# EAGLE board KE3IJ-SuperRegen-FM-receiver (EAGLE 5.07)
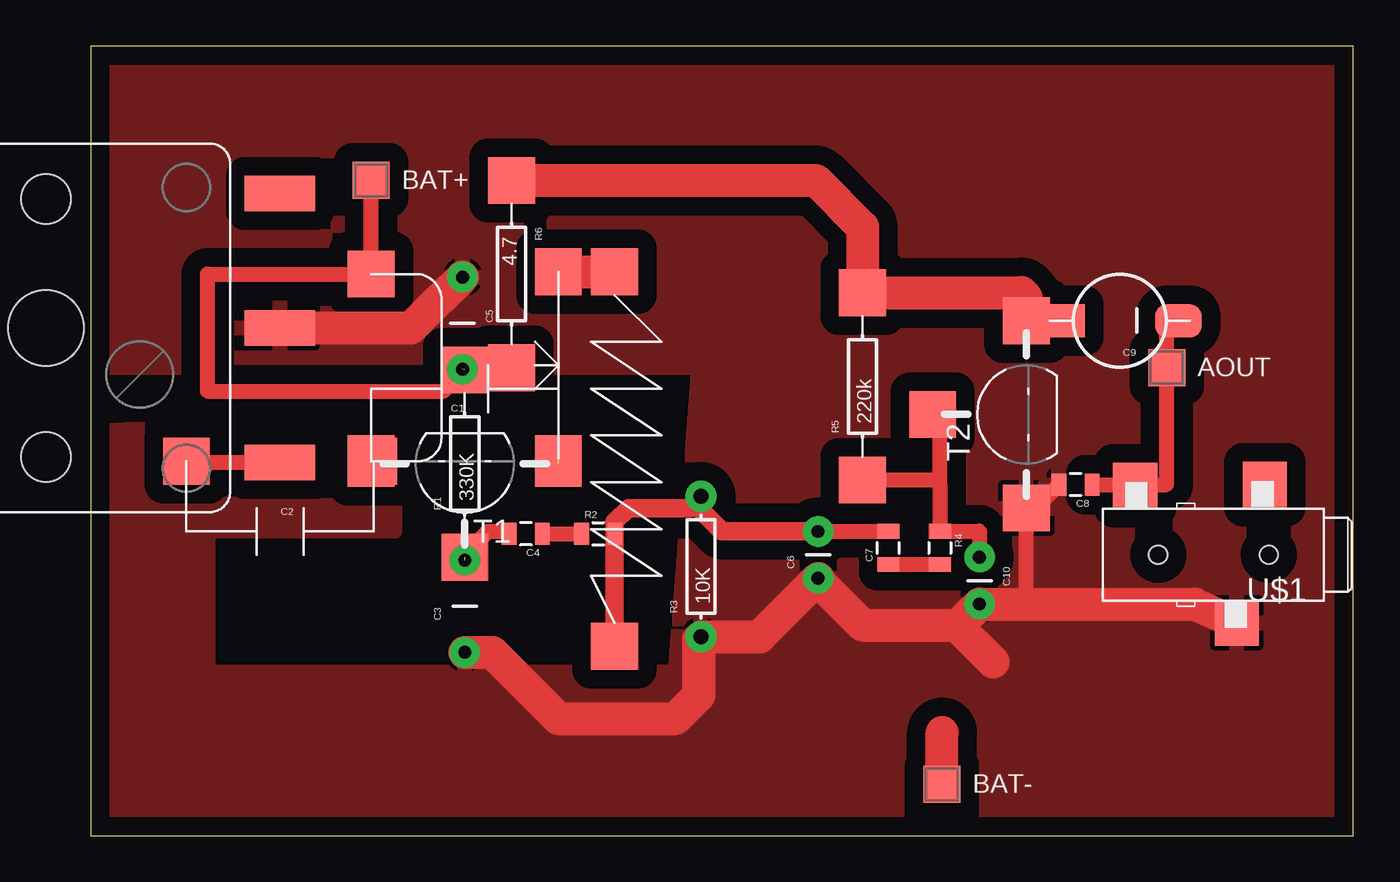
[diagram p0: board, top side]

Size 68.56 x 42.85 mm. Coordinates in mm from the lower left corner, seen from the top.
Outline: 0,0 68.56,0 68.56,42.85 0,42.85 0,0
Copper layers (1*16): Top 0.035mm / dielectric 1.5mm / Bottom 0.035mm
Design rules "SparkFun-RF": minimum track width 8mil, minimum drill 20mil, track to track 8mil, track to pad 8mil, pad to pad 8mil, via to via 8mil, smd to smd 0mil, copper to edge 10mil, drill to drill 8mil, minimum pad ring 12mil, minimum via ring 10mil, stop-mask expansion 4mil, vias tented up to drill 25mil, thermal gap 10mil

## Footprints (pad centres in the part's own frame; a part is rotated, then mirrored left to right if it is on the bottom)
SMD20S = smd 2 x 2: PAD 0,0
CAP-SMD-SMALL = smd 2.54 x 2.54: P$1 5.08,0; P$2 -5.08,0
CAP-PTH-5MM = drill 0.7 pad 1.651 round: 1 -2.5,0; 2 2.5,0
0805 = smd 0.8 x 1.2: 1 -0.9,0; 2 0.9,0
CAP-PTH-SMALL = drill 0.7 pad 1.651 round: 1 0,0; 2 2.54,0
CPOL-SMD-10UF-25V = smd 2.54 x 1.778: + 3.175,0; - -3.175,0
AXIAL-0.3-SMD = smd 2.54 x 2.54: P$1 -5.08,0; P$2 5.08,0
AXIAL-0.3 = drill 0.813 pad 1.676 round: P$1 -3.81,0; P$2 3.81,0
2CM-HELICAL = smd 2.54 x 2.54: P$3 -10.16,0; P$4 10.16,0
TO92-EBC-SMD-MIRROR = smd 2.54 x 2.54: B 0,5.08; C 5.08,0; E -5.08,0
MIN-AUDIO-3.5MM = smd 2.4 x 2.5: 1 -2.794,-3.81; 2 4.257,-3.754; 3 -1.27,3.683 | hole 1: -3,0; 3,0
ANT-WISP-2PAD = smd 2.54 x 2.54: P$3 -5.08,0; P$4 5.08,0
2.54CM-U-COIL = smd 2.54 x 2.54: P$3 -5.08,0; P$4 5.08,0
CBM-CAP = smd 1.93 x 3.81: A 7.3,-12.7; G 0,-12.7; O -7.3,-12.7 | hole 4.1: 0,0 | hole 2.7: -7,0; 7,0

## Placement (x,y rotation side)
AOUT  PAD-SMD20S  [SMD20S]  58.42,25.4 0 top
BAT+  PAD-SMD20S  [SMD20S]  15.24,35.56 0 top
BAT-  PAD-SMD20S  [SMD20S]  46.23,2.79 0 top
C1  7pf  [CAP-SMD-SMALL]  20.32,20.45 0 top
C2  10pf  [CAP-SMD-SMALL]  10.29,20.32 180 top
C3  102  [CAP-PTH-5MM]  20.32,12.45 90 top
C4  0.47uF  [0805]  23.62,16.38 180 top
C5  104  [CAP-PTH-5MM]  20.19,27.81 270 top
C6  102  [CAP-PTH-SMALL]  39.5,13.97 90 top
C7  0.47uf  [0805]  43.31,15.62 90 top
C8  473  [0805]  53.47,19.05 180 top
C9  2.2uF  [CPOL-SMD-10UF-25V]  55.88,27.94 180 top
C10  103  [CAP-PTH-SMALL]  48.26,15.11 270 top
R1  330K  [AXIAL-0.3-SMD]  20.32,20.19 90 top
R2  12K  [0805]  27.56,16.38 0 top
R3  10K  [AXIAL-0.3]  33.15,14.6 90 top
R4  22K  [0805]  46.1,15.62 270 top
R5  220k  [AXIAL-0.3-SMD]  41.91,24.38 90 top
R6  4.7  [AXIAL-0.3-SMD]  22.86,30.48 270 top
RFC  6t #22 on BIC pen  [2CM-HELICAL]  28.45,20.45 270 top
T1  9018  [TO92-EBC-SMD-MIRROR]  20.32,20.19 180 top
T2  9014  [TO92-EBC-SMD-MIRROR]  50.8,22.86 90 top
U$1  AUDIO-JACK-MINI-A3.5  [MIN-AUDIO-3.5MM]  60.96,15.24 180 top
U$2  24'' twisted to 12''  [ANT-WISP-2PAD]  25.4,25.53 90 top
U$3  5.08cm U shape wire  [2.54CM-U-COIL]  15.24,25.4 270 top
U$4  CBM-TUNER-CAP-223P  [CBM-CAP]  -2.41,27.56 90 top

## Library data of the parts
AOUT BAT+ BAT- = dpads
C1-C3 C6 C9 R1-R6 RFC T1 T2 U$1-U$4 = digital-toy
C4 C5 C7 C8 C10 = SparkFun

## Nets
GND: C3.1 C5.1 C6.1 C8.2 C10.2 R3.P$1 T2.E U$1.3 U$4.G
N$1: C1.P$2 C2.P$2 T1.C U$3.P$4
N$2: C10.1 R4.1 R5.P$1 T2.B
N$3: C1.P$1 T1.E U$2.P$3
N$4: C3.2 C4.2 R1.P$1 T1.B
N$5: C4.1 R2.1
N$6: C6.2 C7.2 R2.2 R3.P$2 RFC.P$4
N$7: C7.1 R4.2
N$8: AOUT.PAD C8.1 C9.- U$1.2
N$9: C9.+ R5.P$2 R6.P$1 T2.C
N$10: RFC.P$3 U$2.P$4
N$11: C2.P$1 U$4.O
N$12: BAT-.PAD
VCC: BAT+.PAD C5.2 R1.P$2 R6.P$2 U$3.P$3

## Tracks (layer width: path | path; a pad name or v marks a point on that pad's centre or on a via)
GND
  Top 0.813: 50.8,12.57 T2.E 51.3,17.78 C8.2
  Top 1.778: U$4.G 17.4,27.56 19.05,29.21 19.09,29.21 C5.1 | C3.1 21.8,9.95 25.4,6.35 31.75,6.35 33.02,7.62 33.02,10.67 R3.P$1 36.32,10.79 C6.1 39.5,13.84 41.91,11.43 46.99,11.43 | 46.99,11.43 47.12,11.43 C10.2 50.8,12.57 59.94,12.57 U$1.3 | 46.99,11.43 48.99,9.43
  pour Top (isolate 1.016, rank 6): 81.28,50.8 71.12,-16.51 11.43,-10.16 -6.35,-8.89 -6.35,21.59 16.51,22.86 16.51,16.51 6.35,16.51 6.35,8.89 31.75,8.89 33.02,25.4 -2.54,25.4 -3.81,48.26 30.48,48.26
N$1  (2 unrouted)
  Top 1.778: T1.C U$3.P$4
N$2
  Top 0.813: 46.1,19.05 R4.1 48.25,16.52 48.26,16.51 C10.1 | 46.1,19.05 46.1,22.48 T2.B | R5.P$1 45.85,19.3 46.1,19.05
N$3  (1 unrouted)
N$4  (1 unrouted)
  Top 0.813: 20.32,15.24 21.59,16.51 22.59,16.51 C4.2
  Top 1.016: T1.B 20.32,15.24
N$5
  Top 0.813: C4.1 R2.1
N$6
  Top 0.813: 32.51,17.78 R3.P$2 33.15,17.65 | C6.2 43.3,16.51 C7.2
  Top 1.016: RFC.P$4 R2.2 28.46,17.03 29.21,17.78 32.51,17.78 | 33.15,17.65 34.29,16.51 C6.2
N$7
  Top 0.813: C7.1 R4.2
N$8
  Top 0.813: C8.1 56.65,19.05 U$1.2 56.76,19.05 58.42,19.05 AOUT.PAD 58.42,27.3 C9.-
N$9
  Top 0.813: T2.C C9.+
  Top 1.778: R6.P$1 39.37,35.56 41.91,33.02 R5.P$2 50.55,29.46 50.8,29.21 T2.C
N$10
  Top 1.778: U$2.P$4 RFC.P$3
N$11
  Top 0.813: U$4.O 5.27,20.26 C2.P$1
N$12
  Top 1.778: BAT-.PAD 46.23,5.59
VCC  (1 unrouted)
  Top 0.813: BAT+.PAD U$3.P$3 6.35,30.48 6.35,24.13 19.18,24.13 R1.P$2 | C5.2 20.11,25.4
  Top 1.778: C5.2 22.77,25.31 R6.P$2